# Altium PCB pcb.PcbDoc
Units mil, origin at the board's own origin, x right, y up, seen from the top; angles counter-clockwise.
Board outline 1000 x 1000 mil, 4 copper layers (Top Layer, Layer 1, Layer 2, Bottom Layer), stack 61.855 mil thick; 57 components, 65 nets, 223 pads, 138 vias.
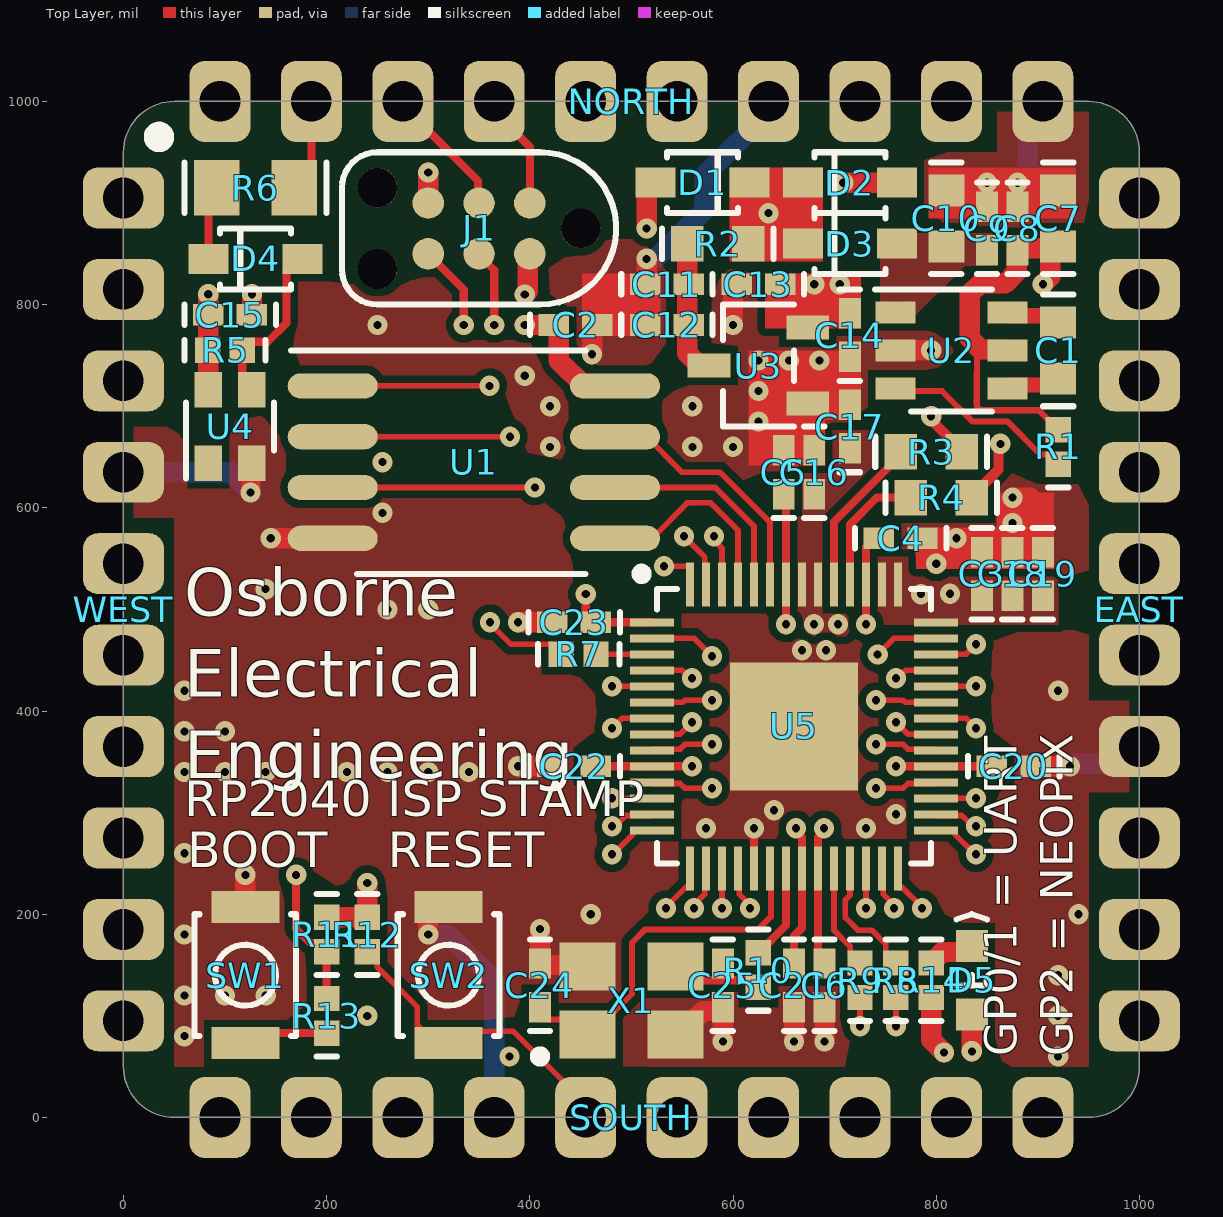
[diagram p0: Top Layer view]
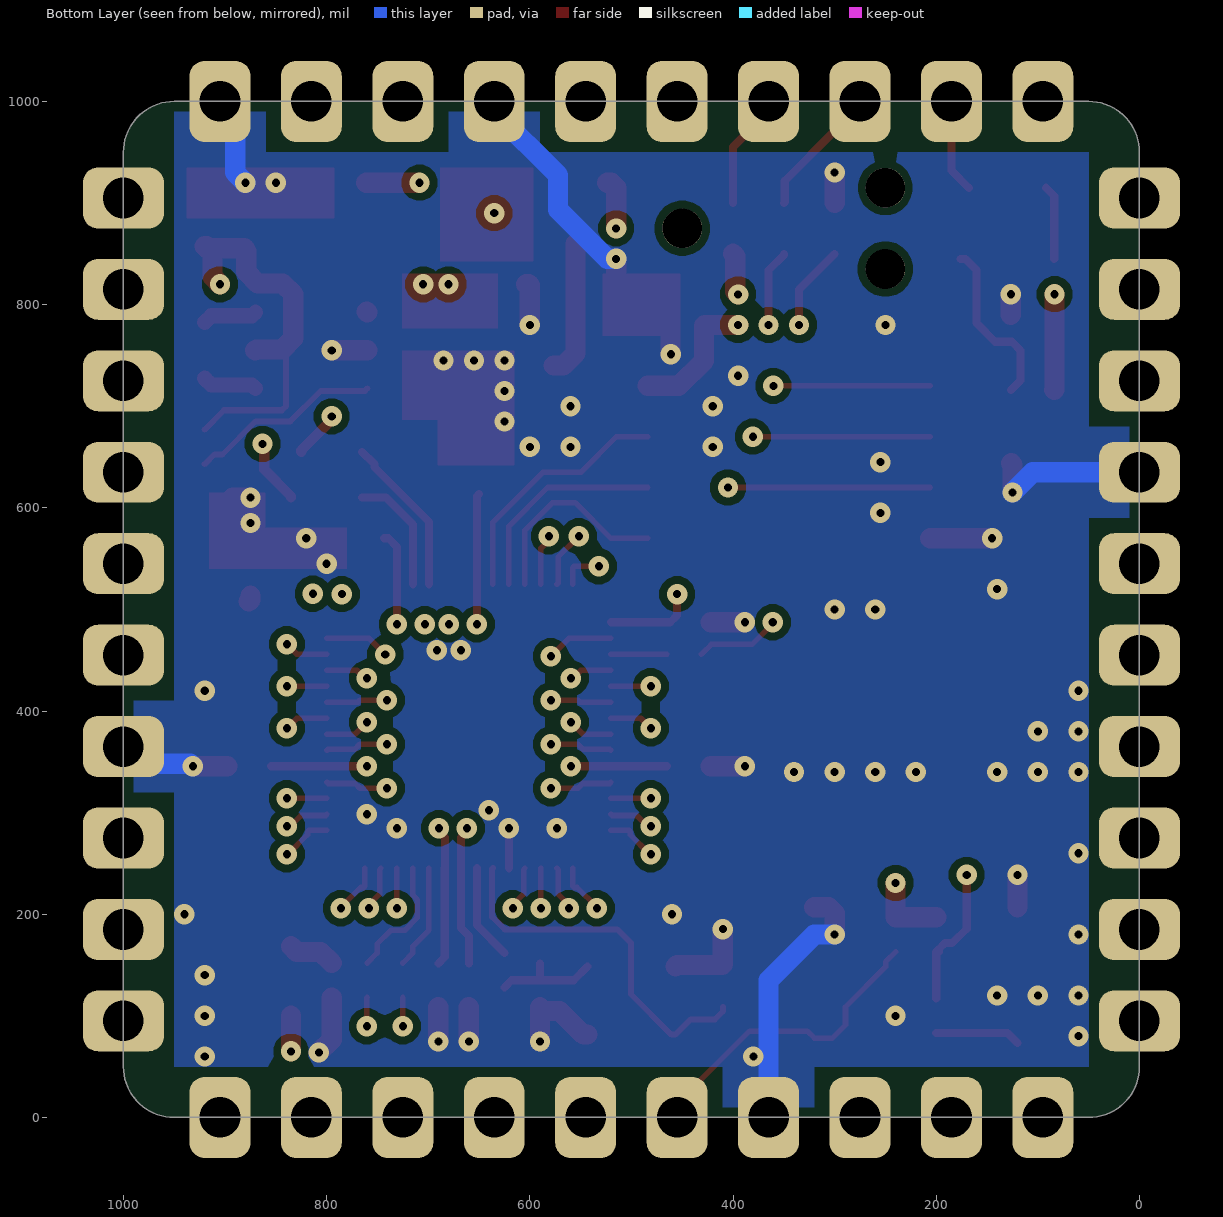
[diagram p1: Bottom Layer view, seen from below]
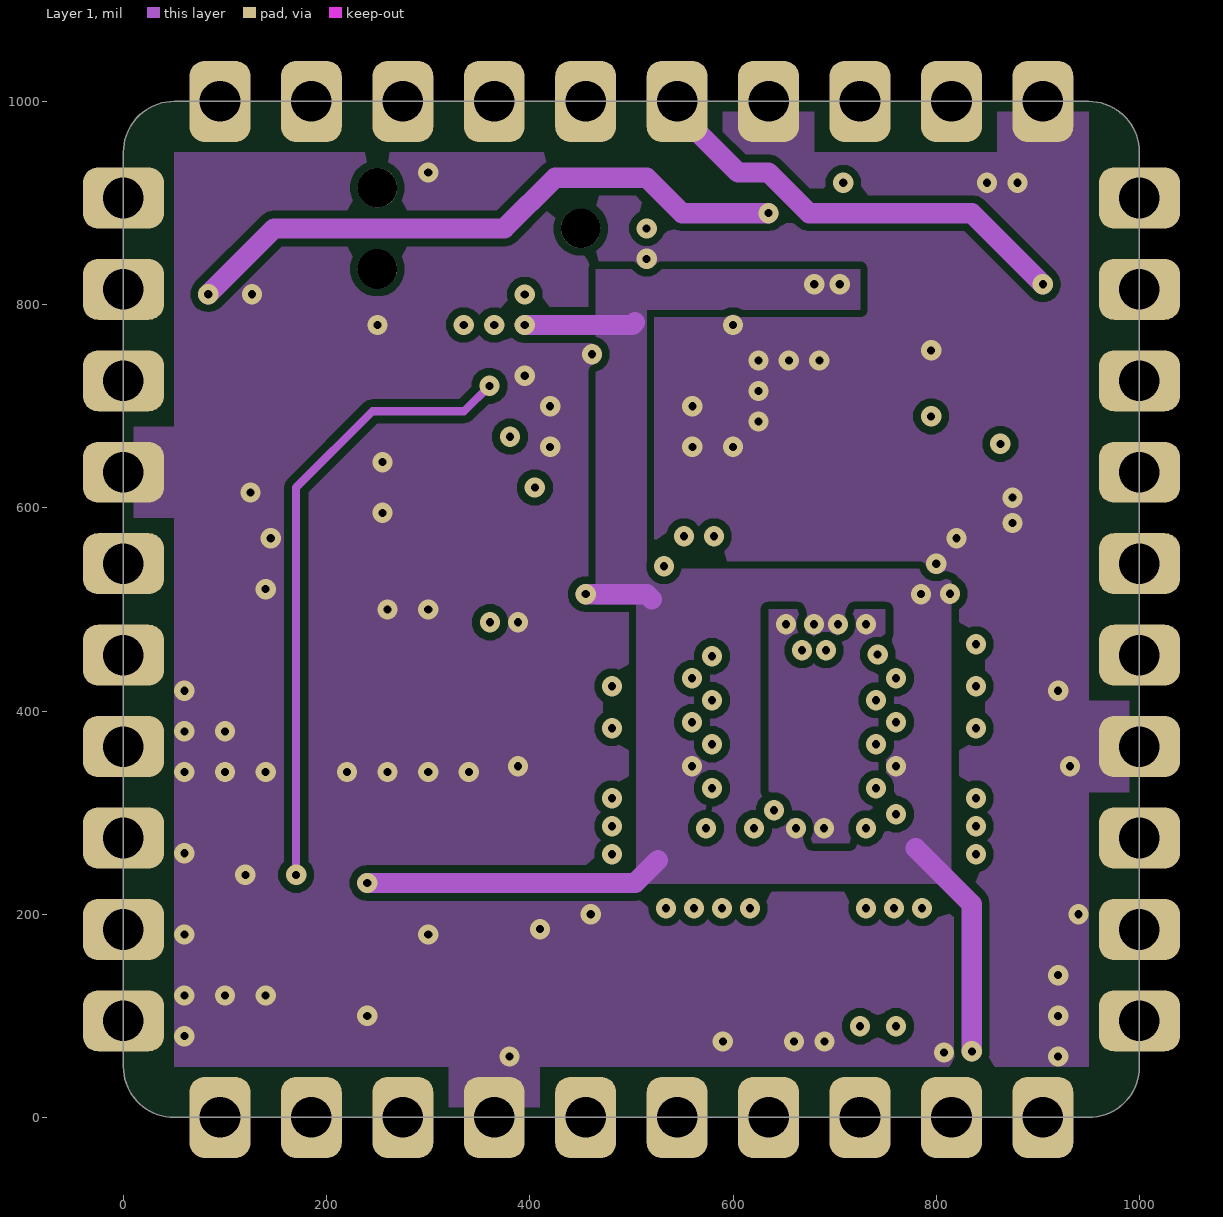
[diagram p2: Layer 1]
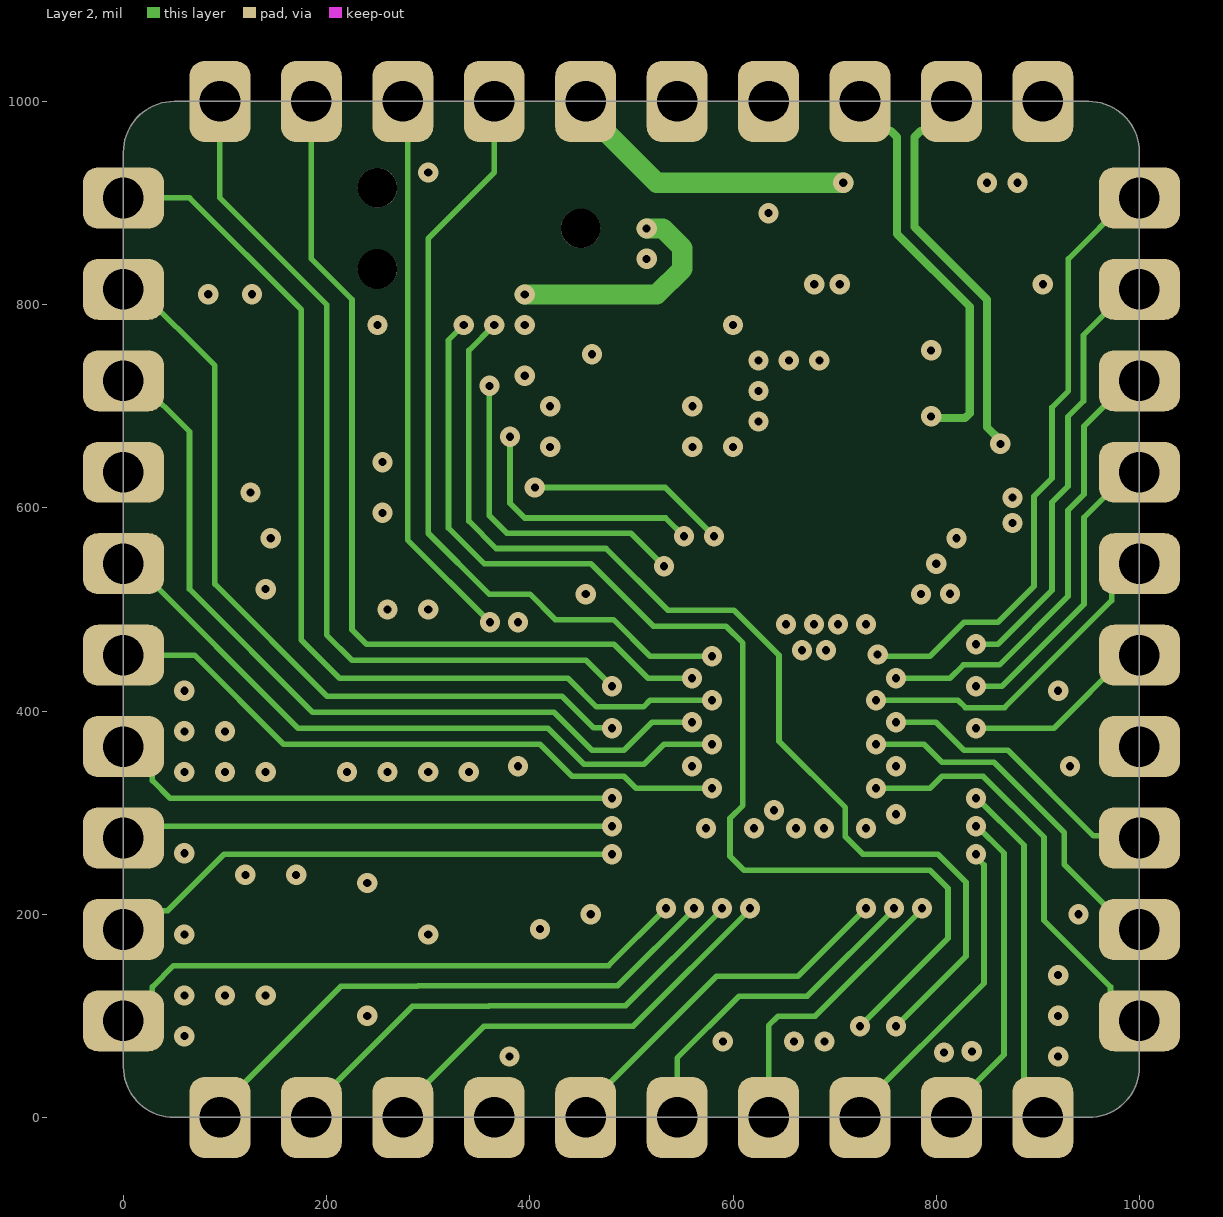
[diagram p3: Layer 2]
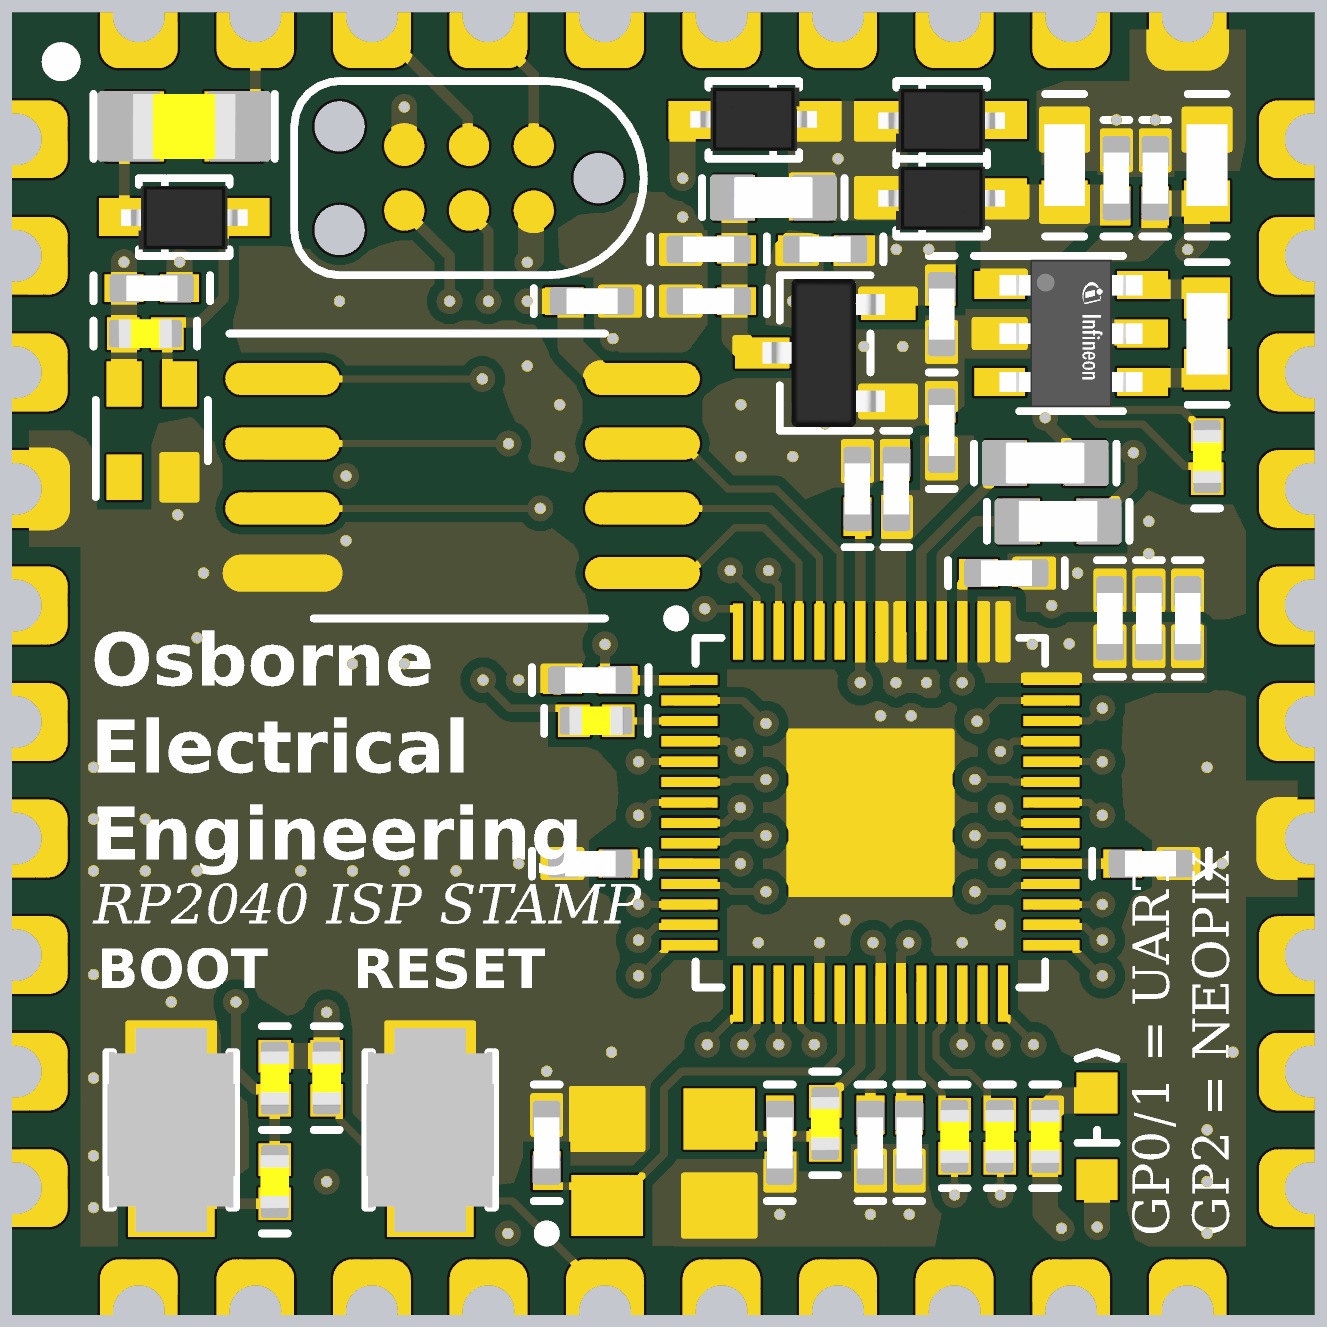
[diagram p4: 3D render of the assembled board from above, using the file's embedded part models]

## Layer stack, top to bottom
Top Solder: solder mask 0.5, Solder Resist, Dk 3.8
Top Layer: signal copper 1.4
Dielectric 2: prepreg 7.874, 7628, Dk 4.6
Layer 1: signal copper 0.689
Dielectric 1: core 41.9291, 7628, Dk 4.6
Layer 2: signal copper 0.689
Dielectric 3: prepreg 7.874, 7628, Dk 4.6
Bottom Layer: signal copper 1.4
Bottom Solder: solder mask 0.5, Solder Resist, Dk 3.8

## Board outline
0,50 0,950 cw(c50,950) 50,1000 950,1000 cw(c950,950) 1000,950 1000,50 cw(c950,50) 950,0 50,0 cw(c50,50)

## Design rules (kind name [scope] priority, off if disabled: settings)
BoardOutlineClearance [Not HasFootprint('CASTELLATIONS')] p1: gap=10 ignorepadtopadclearanceinfootprint=FALSE except(0: Track-OutlineEdge)
Clearance [All] p1: gap=7.5 ignorepadtopadclearanceinfootprint=FALSE except(5: Arc-Arc Arc-Track Track-Track)
ComponentClearance [All] p1: gap=10 collisioncheckmode=3 verticalgap=100000 showdistances=TRUE donotcheckwithout3dbody=TRUE
DiffPairsRouting Netclass_90ohm [InDifferentialPairClass('90ohm')] p1: maxlimit=20 minlimit=6.5 mostfreqgap=20 toplayer_maxgap=6.5 toplayer_prefgap=6.5 toplayer_minwidth=10 toplayer_maxwidth=10 toplayer_prefwidth=10 midlayer2_mingap=9 midlayer2_maxgap=9 midlayer2_prefgap=9 midlayer2_minwidth=8 midlayer2_maxwidth=8 midlayer2_prefwidth=8 impedanceprofiledriven=TRUE impedanceprofileid={C649F7BD-3770-45B3-A50B-245186EF4A6F} impedanceprofilevalue=90.000000 maxuncoupledlength=500
DiffPairsRouting Default_DiffPair [All] p2: maxlimit=10 minlimit=10 mostfreqgap=10 toplayer_minwidth=15 toplayer_maxwidth=15 toplayer_prefwidth=15 midlayer1_minwidth=15 midlayer1_maxwidth=15 midlayer1_prefwidth=15 midlayer2_minwidth=15 midlayer2_maxwidth=15 midlayer2_prefwidth=15 bottomlayer_minwidth=15 bottomlayer_maxwidth=15 bottomlayer_prefwidth=15 maxuncoupledlength=500
HoleSize [All] p1: absolutevalues=TRUE maxlimit=200 minlimit=8 maxpercent=80.000 minpercent=20.000
MinimumAnnularRing [All] p1: minimumring=6
MinimumSolderMaskSliver [All] p1: minsoldermaskwidth=3.94
PasteMaskExpansion [All] p1: expansion=-99999 usepaste=FALSE
PolygonConnect [All] p1: connectstyle=Direct reliefconductorwidth=20 reliefentries=4 polygonreliefangle="90 Angle" airgapwidth=10
RoutingVias [All] p1: holewidth=8 width=20 viastyle="Through Hole" minholewidth=8 minwidth=20 maxholewidth=35 maxwidth=70
SilkToSilkClearance [All] p1: silktosilkclearance=4
SilkToSolderMaskClearance [IsPad] p1: minsilkscreentomaskgap=3.5 clearancetoexposedcopper=FALSE
SolderMaskExpansion [All] p1: expansion=1.97 istentingtop=FALSE
UnRoutedNet [All] p1: checkbadconnections=TRUE
Width Default_Width [All] p1: maxlimit=100 minlimit=3.5 preferedwidth=10
22 further rules are at their usual default settings.

## Classes and differential pairs
differential pair class 90ohm: USB_EXT
differential pair USB_EXT: +USB_EXT_P -USB_EXT_N

## Components (designator, comment, footprint, x,y, rotation, side; value= is the part's Value field where it differs from the comment)
C1 "2.2uF" C0603 920,755 r270 top
C2 "100nF" C0402 445,780 r180 top
C3 "1uF" C0402 845,535 r270 top
C4 "1uF" C0402 765,570 r180 top
C5 "100nF" C0402 650,635 r270 top
C6 "100nF" C0402 690,130 r90 top
C7 "10uF" C0603 920,885 r270 top
C8 "100nF" C0402 880,875 r270 top
C9 "100nF" C0402 850,875 r270 top
C10 "10uF" C0603 810,885 r270 top
C11 "1uF" C0402 535,820 r0 top
C12 "100nF" C0402 535,780 r0 top
C13 "100nF" C0402 625,820 r0 top
C14 "1uF" C0402 715,770 r90 top
C15 "100nF" C0402 105,790 r180 top
C16 "100nF" C0402 680,635 r270 top
C17 "100nF" C0402 715,680 r270 top
C18 "100nF" C0402 875,535 r270 top
C19 "100nF" C0402 905,535 r270 top
C20 "100nF" C0402 876.38,345.63 r180 top
C21 "100nF" C0402 660,130 r90 top
C22 "100nF" C0402 443.62,345.63 r0 top
C23 "100nF" C0402 443.62,487.36 r0 top
C24 "33pF" C0402 410,130 r270 top
C25 "33pF" C0402 590,130 r90 top
D1 "1N5819WS" SOD-323_L1.8-W1.3-LS2.5-RD 570,920 r180 top
D2 "1N5819WS" SOD-323_L1.8-W1.3-LS2.5-RD 715,920 r0 top
D3 "1N5819WS" SOD-323_L1.8-W1.3-LS2.5-RD 715,860 r0 top
D4 "1N4148WS T4" SOD-323_L1.8-W1.3-LS2.5-RD 130,845 r0 top
D5 "19-217/GHC-YR1S2/3T" LED0603-R-RD 835,135 r270 top
EAST "STAMPEDGE" CASTELLATIONS 1000,500 r270 top locked
J1 "TC2030-IDC-NL" TC2030-IDC-NL 450,875 r180 top locked
NORTH "STAMPEDGE" CASTELLATIONS 500,1000 r0 top locked
R1 "10kΩ" R0402 920,660 r90 top
R2 "2.2Ω" R0603 585,860 r180 top
R3 "27Ω" R0603 795,655 r0 top
R4 "27Ω" R0603 805,610 r0 top
R5 "10kΩ" R0402 100,755 r180 top
R6 "0Ω" R0805 130,915 r0 top
R7 "100Ω" R0402 448.12,455.87 r180 top
R8 "100Ω" R0402 760,135 r270 top
R9 "100Ω" R0402 725,135 r270 top
R10 "1kΩ" R0402 625,145 r270 top
R11 "10kΩ" R0402 200,180 r90 top
R12 "10kΩ" R0402 240,180 r90 top
R13 "1kΩ" R0402 200,100 r90 top
R14 "220Ω" R0402 795,135 r90 top
SOUTH "STAMPEDGE" CASTELLATIONS 500,0 r180 top locked
SW1 "B3U-1000P" KEY-SMD_B3U-1000PM 120,140 r270 top
SW2 "B3U-1000P" KEY-SMD_B3U-1000PM 320,140 r270 top
U1 "W25Q128JVSIQTR" SOIC-8_L5.3-W5.3-P1.27-LS8.0-BL 345,645 r270 top
U2 "HX4002" SOT-23-6_L2.9-W1.6-P0.95-LS2.8-BR 815,755 r180 top
U3 "XC6206P332MR" SOT-23-3_L2.9-W1.6-P1.90-LS2.8-BR 625,740 r0 top
U4 "WS2812B-2020" LED-SMD_4P-L2.0-W2.0-TL_WS2812B-2020 105,680 r90 top
U5 "RP2040" LQFN-56_L7.0-W7.0-P0.4-EP 660,385 r0 top
WEST "STAMPEDGE" CASTELLATIONS 0,500 r90 top locked
X1 "12MHz" OSC-SMD_4P-L3.2-W2.5-BL 500,115 r0 top

## Footprints (in the part's own frame and the unit in brackets; to place one, negate y for a bottom-side part, rotate by r counter-clockwise, add the part's x,y. Pads: shape width x height; smd on the part's side, far side on the other; paste and mask are expansions set on the pad)
C0402 [mil]
  rect 30x21.5 smd: 1(-21.5,0) 2(21.5,0)
  silkscreen extent -45,-10 45,10, body extent -20,-10 20,10, height 5
C0603 [mm]
  rect 0.8x0.9 smd: 1(-0.7,0) 2(0.7,0)
  silkscreen extent -1.4,-0.38 1.4,0.38, body extent -0.8,-0.4 0.8,0.4, height 0.8
CASTELLATIONS [mil]
  rrect50% 60x80 hole 40 paste-100: 1(-405,0) 2(-315,0) 3(-225,0) 4(-135,0) 5(-45,0) 6(45,0) 7(135,0) 8(225,0) 9(315,0) 10(405,0)
KEY-SMD_B3U-1000PM [mm]
  rect 0.8x1.7 smd: 1(-1.7,0) 2(1.7,0)
  silkscreen extent -1.52,-1.27 1.52,1.27, body extent -2,-1.25 2,1.25, height 1.6
LED0603-R-RD [mm]
  rect 0.8x0.8 smd: 1(0.851,0) 2(-0.851,0)
  silkscreen extent -1.65,-0.38 0.13,0.38
LED-SMD_4P-L2.0-W2.0-TL_WS2812B-2020 [mil]
  rect 35x27 smd: 1(-36,21.3) 2(-36,-21.3) 3(36,-21.3) 4(36,21.3)
  silkscreen extent -51,-43 24,43, body extent -43,-39 43,39, height 33
LQFN-56_L7.0-W7.0-P0.4-EP [mm]
  rect 1.1x0.2 smd: 1(-3.55,2.6) 2(-3.55,2.2) 3(-3.55,1.8) 4(-3.55,1.4) 5(-3.55,1) 6(-3.55,0.6) 7(-3.55,0.2) 8(-3.55,-0.2) 9(-3.55,-0.6) 10(-3.55,-1) 11(-3.55,-1.4) 12(-3.55,-1.8) 13(-3.55,-2.2) 14(-3.55,-2.6) 29(3.55,-2.6) 30(3.55,-2.2) 31(3.55,-1.8) 32(3.55,-1.4) 33(3.55,-1) 34(3.55,-0.6) 35(3.55,-0.2) 36(3.55,0.2) 37(3.55,0.6) 38(3.55,1) 39(3.55,1.4) 40(3.55,1.8) 41(3.55,2.2) 42(3.55,2.6)
  rect 0.2x1.1 smd: 15(-2.6,-3.55) 16(-2.2,-3.55) 17(-1.8,-3.55) 18(-1.4,-3.55) 19(-1,-3.55) 20(-0.6,-3.55) 21(-0.2,-3.55) 22(0.2,-3.55) 23(0.6,-3.55) 24(1,-3.55) 25(1.4,-3.55) 26(1.8,-3.55) 27(2.2,-3.55) 28(2.6,-3.55) 43(2.6,3.55) 44(2.2,3.55) 45(1.8,3.55) 46(1.4,3.55) 47(1,3.55) 48(0.6,3.55) 49(0.2,3.55) 50(-0.2,3.55) 51(-0.6,3.55) 52(-1,3.55) 53(-1.4,3.55) 54(-1.8,3.55) 55(-2.2,3.55) 56(-2.6,3.55)
  rect 3.2x3.2 smd: 57(0,0)
  silkscreen extent -3.94,-3.43 3.43,3.94, body extent -3.5,-3.5 3.5,3.5, height 0.9
OSC-SMD_4P-L3.2-W2.5-BL [mm]
  rect 1.4x1.2 smd: 1(-1.1,-0.85) 2(1.1,-0.85) 3(1.1,0.85) 4(-1.1,0.85)
  silkscreen extent -2.41,-1.52 -2.16,-1.27, body extent -1.6,-1.3 1.6,1.3, height 0.76
R0402 [mil]
  rect 25x25 smd: 1(-17,0) 2(17,0)
  silkscreen extent -40,-10 40,10, body extent -21,-11 21,11, height 19
R0603 [mil]
  rect 32x35 smd: 1(-30,0) 2(30,0)
  silkscreen extent -55,-15 55,15, body extent -31,-16 31,16, height 19
R0805 [mil]
  rect 44.59x54.21 smd: 1(-38.04,0) 2(38.04,0)
  silkscreen extent -70,-25 70,25, body extent -40,-25 40,25, height 19
SOD-323_L1.8-W1.3-LS2.5-RD [mm]
  rect 1x0.75 smd: 1(-1.173,0) 2(1.173,0)
  silkscreen extent -0.89,-0.76 0.89,0.76, body extent -1.24,-0.64 1.25,0.61, height 0.88
SOIC-8_L5.3-W5.3-P1.27-LS8.0-BL [mm]
  oval 0.63x2.25 smd: 1(-1.905,-3.53) 2(-0.635,-3.53) 3(0.635,-3.53) 4(1.905,-3.53) 5(1.905,3.53) 6(0.635,3.53) 7(-0.635,3.53) 8(-1.905,3.53)
  silkscreen extent -2.79,-4.57 2.79,2.79, body extent -2.67,-2.29 2.64,2.29, height 2.16
SOT-23-3_L2.9-W1.6-P1.90-LS2.8-BR [mm]
  rect 1.07x0.6 smd: 1(1.235,-0.95) 2(1.235,0.95) 3(-1.235,0)
  silkscreen extent -0.89,-1.52 0.89,1.52, body extent -1.23,-1.45 1.17,1.45, height 0.96
SOT-23-6_L2.9-W1.6-P0.95-LS2.8-BR [mm]
  rect 1x0.55 smd: 1(1.4,-0.95) 2(1.4,0) 3(1.4,0.95) 4(-1.4,0.95) 5(-1.4,0) 6(-1.4,-0.95)
  silkscreen extent -1.02,-1.52 1.91,1.52, body extent -1.4,-1.45 1.4,1.45, height 1.26
TC2030-IDC-NL [mil] "Tag Connect 6-Pin No Legs"
  round 38.9 hole 39 unplated: 0(0,0) 0(200,-40) 0(200,40)
  round 31 smd paste-100: 1(50,-25) 2(50,25) 3(100,-25) 4(100,25) 5(150,-25) 6(150,25)
  silkscreen extent -35,-75 235,75

## Part data
C1: "16V 2.2uF X5R ±10% 0603  Multilayer Ceramic Capacitors MLCC - SMD/SMT ROHS", BOM_JLCPCB Part Class="Basic Part", BOM_Manufacturer=SAMSUNG, BOM_Manufacturer Part=CL10A225KO8NNNC, BOM_Supplier=LCSC, BOM_Supplier Part=C23630, nameAlias=Capacitance, spicePre=C, spiceSymbolName=CL10A225KO8NNNC
C2 C5 C6 C8 C9 C12 C13 C15 C16 C17 C18 C19 C20 C21 C22 C23: "16V 100nF X7R ±10% 0402  Multilayer Ceramic Capacitors MLCC - SMD/SMT ROHS", BOM_JLCPCB Part Class="Basic Part", BOM_Manufacturer=SAMSUNG, BOM_Manufacturer Part=CL05B104KO5NNNC, BOM_Supplier=LCSC, BOM_Supplier Part=C1525, nameAlias=Capacitance, spicePre=C, spiceSymbolName=CL05B104KO5NNNC
C3 C4 C11 C14: "25V 1uF X5R ±10% 0402  Multilayer Ceramic Capacitors MLCC - SMD/SMT ROHS", BOM_JLCPCB Part Class="Basic Part", BOM_Manufacturer=SAMSUNG, BOM_Manufacturer Part=CL05A105KA5NQNC, BOM_Supplier=LCSC, BOM_Supplier Part=C52923, nameAlias=Capacitance, spicePre=C, spiceSymbolName=CL05A105KA5NQNC
C7 C10: "X5R 25V ±20% 10uF 0603 Multilayer Ceramic Capacitors MLCC - SMD/SMT ROHS", BOM_JLCPCB Part Class="Basic Part", BOM_Manufacturer=SAMSUNG, BOM_Manufacturer Part=CL10A106MA8NRNC, BOM_Supplier=LCSC, BOM_Supplier Part=C96446, nameAlias=Capacitance, spicePre=C, spiceSymbolName=CL10A106MA8NRNC
C24 C25: "50V 33pF C0G ±5% 0402  Multilayer Ceramic Capacitors MLCC - SMD/SMT ROHS", BOM_JLCPCB Part Class="Basic Part", BOM_Manufacturer=FH, BOM_Manufacturer Part=0402CG330J500NT, BOM_Supplier=LCSC, BOM_Supplier Part=C1562, nameAlias=Capacitance, spicePre=C, spiceSymbolName=0402CG330J500NT
D1 D2 D3: "40V 600mV@1A 1A SOD-323  Schottky Barrier Diodes (SBD) ROHS", BOM_JLCPCB Part Class="Basic Part", BOM_Manufacturer="Guangdong Hottech", BOM_Manufacturer Part=1N5819WS, BOM_Supplier=LCSC, BOM_Supplier Part=C191023, Contributor=LCSC, spicePre=D, spiceSymbolName=1N5819WS
D4: "100V +150℃@(Tj) 200mW Single 1.25V@150mA 4ns 1μA@75V 150mA SOD-323  Switching Diode ROHS", BOM_JLCPCB Part Class="Basic Part", BOM_Manufacturer=CJ, BOM_Manufacturer Part="1N4148WS T4", BOM_Supplier=LCSC, BOM_Supplier Part=C2128, spicePre=D, spiceSymbolName="1N4148WS T4"
D5: "20mA 285mcd 3.3V 518nm Colorless transparence -40℃~+85℃ 520nm~535nm Emerald 120° 110mW 0603  Light Emitting Diodes (LED) ROHS", BOM_JLCPCB Part Class="Basic Part", BOM_Manufacturer=EVERLIGHT, BOM_Manufacturer Part=19-217/GHC-YR1S2/3T, BOM_Supplier=LCSC, BOM_Supplier Part=C72043, spicePre=L, spiceSymbolName=19-217/GHC-YR1S2/3T
EAST NORTH SOUTH WEST: "RP2040 ISP Stamp Castellations"
J1: "Tag-Connect 6-Pin No Legs"
R1 R5 R11 R12: "1/16W Thick Film Resistors 50V ±1% ±100ppm/℃ -55℃~+155℃ 10kΩ 0402  Chip Resistor - Surface Mount ROHS", BOM_JLCPCB Part Class="Basic Part", BOM_Manufacturer=UniOhm, BOM_Manufacturer Part=0402WGF1002TCE, Resistance (Ohms)=10K, BOM_Supplier=LCSC, BOM_Supplier Part=C25744, nameAlias=Resistance, spicePre=R, spiceSymbolName=0402WGF1002TCE
R2: "1/10W Thick Film Resistors 75V ±1% ±400ppm/℃ -55℃~+155℃ 2.2Ω 0603  Chip Resistor - Surface Mount ROHS", BOM_JLCPCB Part Class="Basic Part", BOM_Manufacturer=UniOhm, BOM_Manufacturer Part=0603WAF220KT5E, Resistance (Ohms)=2.2, BOM_Supplier=LCSC, BOM_Supplier Part=C22939, nameAlias=Resistance, spicePre=R, spiceSymbolName=0603WAF220KT5E
R3 R4: "1/10W Thick Film Resistors 75V ±1% ±200ppm/℃ -55℃~+155℃ 27Ω 0603  Chip Resistor - Surface Mount ROHS", BOM_JLCPCB Part Class="Basic Part", BOM_Manufacturer=UniOhm, BOM_Manufacturer Part=0603WAF270JT5E, Resistance (Ohms)=27, BOM_Supplier=LCSC, BOM_Supplier Part=C25190, nameAlias=Resistance, spicePre=R, spiceSymbolName=0603WAF270JT5E
R6: "125mW Thick Film Resistors 150V ±1% ±800ppm/℃ -55℃~+155℃ 0mΩ 0805  Chip Resistor - Surface Mount ROHS", BOM_JLCPCB Part Class="Basic Part", BOM_Manufacturer=UniOhm, BOM_Manufacturer Part=0805W8F0000T5E, Resistance (Ohms)=0, BOM_Supplier=LCSC, BOM_Supplier Part=C17477, nameAlias=Resistance, spicePre=R, spiceSymbolName=0805W8F0000T5E
R7 R8 R9: "1/16W Thick Film Resistors 50V ±1% ±200ppm/℃ -55℃~+155℃ 100Ω 0402  Chip Resistor - Surface Mount ROHS", BOM_JLCPCB Part Class="Basic Part", BOM_Manufacturer=UniOhm, BOM_Manufacturer Part=0402WGF1000TCE, Resistance (Ohms)=100, BOM_Supplier=LCSC, BOM_Supplier Part=C25076, nameAlias=Resistance, spicePre=R, spiceSymbolName=0402WGF1000TCE
R10 R13: "1/16W Thick Film Resistors 50V ±1% ±100ppm/℃ -55℃~+155℃ 1kΩ 0402  Chip Resistor - Surface Mount ROHS", BOM_JLCPCB Part Class="Basic Part", BOM_Manufacturer=UniOhm, BOM_Manufacturer Part=0402WGF1001TCE, Resistance (Ohms)=1K, BOM_Supplier=LCSC, BOM_Supplier Part=C11702, nameAlias=Resistance, spicePre=R, spiceSymbolName=0402WGF1001TCE
R14: "1/16W Thick Film Resistors 50V ±1% ±100ppm/℃ -55℃~+155℃ 220Ω 0402  Chip Resistor - Surface Mount ROHS", BOM_JLCPCB Part Class="Basic Part", BOM_Manufacturer=UniOhm, BOM_Manufacturer Part=0402WGF2200TCE, Resistance (Ohms)=220, BOM_Supplier=LCSC, BOM_Supplier Part=C25091, nameAlias=Resistance, spicePre=R, spiceSymbolName=0402WGF2200TCE
SW1 SW2: "2.5mm 1.6mm Round Button 50mA Brick nogging 3mm SPST 12V SMD,3x2.5x1.6mm  Tactile Switches ROHS", BOM_JLCPCB Part Class="Extended Part", BOM_Manufacturer="Omron Electronics", BOM_Manufacturer Part=B3U-1000P, BOM_Supplier=LCSC, BOM_Supplier Part=C231329, Contributor=LCSC, spicePre=S, spiceSymbolName=B3U-1000P
U1: "SOIC-8_208mil  NOR FLASH ROHS", BOM_JLCPCB Part Class="Basic Part", BOM_Manufacturer=WINBOND, BOM_Manufacturer Part=W25Q128JVSIQTR, BOM_Supplier=LCSC, BOM_Supplier Part=C97521, spicePre=U, spiceSymbolName=W25Q128JVSIQTR
U2: "NO Charge pump 1 5V 2.7V~5.5V 250mA 1.2MHz SOT-23-6  DC-DC Converters ROHS", BOM_JLCPCB Part Class="Extended Part", BOM_Manufacturer=HEXIN, BOM_Manufacturer Part=HX4002, BOM_Supplier=LCSC, BOM_Supplier Part=C172354, Contributor=LCSC, spicePre=U, spiceSymbolName=HX4002
U3: "200mA 680mV@(100mA) Fixed 3.3V~3.3V Positive 1 6V SOT-23-3L  Linear Voltage Regulators (LDO) ROHS", BOM_JLCPCB Part Class="Basic Part", BOM_Manufacturer=TOREX, BOM_Manufacturer Part=XC6206P332MR, BOM_Supplier=LCSC, BOM_Supplier Part=C5446, spicePre=U, spiceSymbolName=XC6206P332MR
U4: "5mA 5.3V -25℃~+85℃ RGB SMD,2x2mm  Light Emitting Diodes (LED) ROHS", BOM_JLCPCB Part Class="Extended Part", BOM_Manufacturer=Worldsemi, BOM_Manufacturer Part=WS2812B-2020, BOM_Supplier=LCSC, BOM_Supplier Part=C965555, Contributor=LCSC, spicePre=L, spiceSymbolName=WS2812B-2020
U5: "ARM Cortex-M0 1@x4ch/12bit USB Host/Device 2 264KB 2 133MHz 30 2 QFN-56(7x7)  Microcontroller Units (MCUs/MPUs/SOCs) ROHS", BOM_JLCPCB Part Class="Extended Part", BOM_Manufacturer="Raspberry Pi(树莓派)", BOM_Manufacturer Part=RP2040, BOM_Supplier=LCSC, BOM_Supplier Part=C2040, Contributor=LCSC, spicePre=U, spiceSymbolName=RP2040
X1: "12MHz SMD Crystal Resonator 20pF ±10ppm ±30ppm -40℃~+85℃ SMD3225-4P  Crystals ROHS", BOM_JLCPCB Part Class="Basic Part", BOM_Manufacturer=YXC, BOM_Manufacturer Part=X322512MSB4SI, BOM_Supplier=LCSC, BOM_Supplier Part=C9002, nameAlias=Frequency, spicePre=X, spiceSymbolName=X322512MSB4SI

## Via types
v1: diameter 20, hole 8, Top Layer to Bottom Layer, tented both sides, 138 vias

## Nets (pads, with @x,y where several pads share a name; then routed paths per layer and width w, separated by ;. In a path a pad name is that pad's centre, name@x,y a point inside that pad or via, vN(x,y) a via of type N, cw(c..) or ccw(c..) an arc to the next point about the centre after c; other vN are vias at no path point)
1V1: C4.2 C5.2 C6.2 U5.23 U5.45 U5.50 | length 359.5
  Top Layer w8: C5.2 652.06,611.44 U5.50 U5.50 v1(652.13,485.39) ; v1(689.53,284.61) 689.53,281.36 683.62,275.45 U5.23 683.68,245.17 683.68,157.82 C6.2 ; v1(730.87,485.39) U5.45 730.87,561.62 739.25,570 C4.2
3V3: C2.2 C3.2 C13.2 C14.2 C16.2 C17.2 C18.2 C19.2 C20.2 C21.2 C22.2 C23.2 D5.1 R11.2 R12.2 U1.8 U3.2 U5.1 U5.10 U5.22 U5.33 U5.42 U5.43 U5.44 U5.48 U5.49 | length 1394.3
  Top Layer w8: v1(455,515) 455,494.11 461.75,487.36 C23.2 U5.1 ; C22.2 v1(559.61,345.63) ; C21.2 660,178.5 667.87,186.37 U5.22 667.87,275.45 661.97,281.36 v1(661.97,284.61) ; v1(760.39,345.63) C20.2
  Top Layer w20: R11.2 R12.2 v1(240,230.77) ; v1(395,780) C2.2 427.75,780 428.5,779.25 428.5,744.89 453.39,720 U1.8 ; C13.2 v1(680,820) ; D5.1@835,100 835.07,99.93 v1(835.07,65) ; C18.2 875,509.25 C18.2@876.54,507.71
  Layer 1 w20: v1(240,230.77) 503.8,230.77 526.14,253.11 ; v1(395,780) 501.11,780 503.61,782.5 ; v1(455,515) 515,515 520,510 ; 780,265 835.07,209.93 v1(835.07,65)
  other v1: 679.68,485.39 703.31,485.39 785,515 813.5,515.41 705,820
3V3_EXT: C7.2 C8.2 NORTH.6 R1.2 U2.5 | length 839.5
  Top Layer w6: 840,759.65 840,732.84 839.94,732.78 839.94,702.42 840,702.36 840,700 844,696 901,696 R1.2
  Top Layer w20: U2.5 869.3,755.82 843.83,755.82 832.94,766.71 832.94,810.47 843.19,820.72 867.72,820.72 879.25,832.25 879.25,852.75 C8.2 880,854.72 880.75,855.47 918.03,855.47 C7.2 918.03,857.45 912.28,851.7 912.28,827.28 v1(905,820)
  Layer 1 w20: NORTH.6 545,990 605,930 635,930 675,890 835,890 v1(905,820)
5V: C15.2 D1.1 D2.1 D3.1 R2.1 R5.2 U4.4 | length 707.9
  Top Layer w20: v1(83.5,810.24) C15.2 83.6,789.9 83.6,716.1 U4.4
  Layer 1 w20: v1(83.5,810.24) 148.26,875 375,875 425,925 515,925 550,890 v1(635,890)
5V_DBG: D1.2 J1.2 | length 322.2
  Top Layer w20: v1(395,810) 397.9,812.9 397.9,847.9 J1.2 ; v1(515,875) 515,915.24 519.76,920 D1.2
  Layer 2 w20: v1(395,810) 525,810 550,835 550,855.78 530.78,875 v1(515,875)
5V_EXT: D2.2 NORTH.5 | length 345.2
  Top Layer w20: v1(708.52,920) D2.2
  Layer 2 w20: NORTH.5 455,990 525,920 v1(708.52,920)
GND: C2.1 C3.1 C4.1 C5.1 C6.1 C7.1 C8.1 C9.1 C10.1 C11.1 C12.1 C13.1 C14.1 C15.1 C16.1 C17.1 C18.1 C19.1 C20.1 C21.1 C22.1 C23.1 C24.1 C25.1 EAST.7 J1.5 NORTH.7 NORTH.10 R14.1 SOUTH.7 SW1.1 SW2.1 U1.4 U2.2 U3.1 U4.2 U5.19 U5.57 WEST.7 X1.2 X1.4 | length 1779
  Top Layer w8: U5.19 v1(620.63,284.61)
  Top Layer w20: SW1.1 v1(120,238.77) ; v1(125,615) 125,642.7 U4.2 ; C15.1 v1(126.5,810.24) ; v1(145,570) U1.4 ; v1(300,180) 300,201.18 305.75,206.93 SW2.1 ; J1.5 v1(300,930) ; v1(388.35,345.63) C22.1 ; v1(388.35,487.36) C23.1 ; v1(410,185.27) C24.1 410,150.73 410.75,149.98 455.18,149.98 X1.4 ; v1(461.14,751.14) 461.5,751.5 461.5,779.25 462.25,780 C2.1 ; 490,779.25 490.75,780 C12.1 ; C11.1 514.25,820 515,820.75 v1(515,845) ; X1.2 547.24,81.54 570.44,104.73 589.25,104.73 590,105.48 C25.1 v1(590,74.73) ; v1(600,780) 600,819.25 600.75,820 C13.1 ; v1(660,74.73) C21.1 ; v1(690,74.73) C6.1 ; U2.2 v1(795,755) ; R14.1 795,76.55 v1(807.59,63.96) ; C10.1 v1@850,912.55 ; v1(850,920) v1@850,912.55 ; C18.1 v1(875,585) ; v1(875,610) 892.43,610 900,602.43 900,561.5 C19.1 ; v1(880,920) v1@880,912.55 ; C20.1 v1(931.65,345.63) ; C7.1 v1@880,912.55 ; v1@850,912.55 v1@880,912.55
  Bottom Layer w20: WEST.7 105,635 v1(125,615) ; v1(300,180) 320,180 365,135 SOUTH.7 ; v1(515,845) 523.89,845 572.24,893.35 572.24,927.24 635,990 NORTH.7 ; v1(880,920) 890,930 890,985 NORTH.10 ; v1(931.65,345.63) 934.11,348.09 983.09,348.09 EAST.7
  other v1: 380,60 920,60 60,80 240,100 920,100 60,120 100,120 140,120 920,140 60,180 460,200 940,200 60,260 573.39,284.61 730.87,284.61 760.39,298.39 640.32,302.32 60,340 100,340 140,340 220,340 260,340 300,340 340,340 60,380 100,380 60,420 920,420 667.87,459.8 691.5,459.8 260,500 300,500 140,520 800,545 820,570 255,595 255,645 420,660 560,660 600,660 625,685 420,700 560,700 625,715 395,730 625,745 655,745 685,745 250,780
GPIO0TX: J1.1 NORTH.4 U5.2 | length 962.3
  Top Layer w5.5: U5.2 561.57,471.61 v1(579.29,453.9)
  Top Layer w8: NORTH.4 365,990 400,955 J1.1
  Layer 2 w5.5: NORTH.4 365,930 300,865 300,575 360,515 400,515 425,490 482.17,490 518.27,453.9 v1(579.29,453.9)
GPIO1RX: R7.1 U5.3 | length 55.1
  Top Layer w5.5: R7.1 U5.3
GPIO2LED: NORTH.2 R6.2 U5.4 | length 1025.6
  Top Layer w5.5: U5.4 549.69,440.12 557.56,432.24 v1(559.61,432.24)
  Top Layer w8: R6.2 185,931.96 NORTH.2
  Layer 2 w5.5: NORTH.2 185,845 225,805 225,480 239.29,465.71 482.83,465.71 516.3,432.24 v1(559.61,432.24)
GPIO3: NORTH.1 U5.5 | length 909.7
  Top Layer w5.5: v1(480.87,424.37) U5.5
  Layer 2 w5.5: NORTH.1 95,905 200,800 200,475 225.04,449.96 455.28,449.96 v1(480.87,424.37)
GPIO4: U5.6 WEST.10 | length 1039.7
  Top Layer w5.5: U5.6 550.65,408.62 552.62,410.59 v1(579.29,410.59)
  Layer 2 w5.5: WEST.10 65,905 175,795 175,470 212.76,432.24 437.56,432.24 465.68,404.12 511.8,404.12 518.27,410.59 v1(579.29,410.59)
GPIO5: U5.7 WEST.9 | length 829.2
  Top Layer w5.5: v1(480.87,383.03) v1(480.87,383.03) 490.79,392.87 U5.7
  Layer 2 w5.5: WEST.9 15,815 90,740 90,525 200.47,414.53 431.65,414.53 462.63,383.55 480.35,383.55 v1(480.87,383.03)
GPIO6: U5.8 WEST.8 | length 856.7
  Top Layer w5.5: U5.8 547.8,377.13 v1(559.61,388.94)
  Layer 2 w5.5: WEST.8 15,725 65,675 65,520 186.22,398.78 423.78,398.78 461.18,361.38 492.68,361.38 520.24,388.94 v1(559.61,388.94)
GPIO7: U5.9 WEST.6 | length 730.7
  Top Layer w5.5: U5.9 521.42,362.57 547.9,362.57 552.62,367.28 v1(579.29,367.28)
  Layer 2 w5.5: WEST.6 10,545 171.97,383.03 417.87,383.03 453.31,347.6 512.36,347.6 532.05,367.28 v1(579.29,367.28)
GPIO8: U5.11 WEST.5 | length 695.1
  Top Layer w5.5: U5.11 521.42,328.7 547.9,328.7 552.62,323.98 v1(579.29,323.98)
  Layer 2 w5.5: WEST.5 70,455 157.72,367.28 410,367.28 441.5,335.79 492.68,335.79 504.49,323.98 v1(579.29,323.98)
GPIO9: U5.12 WEST.4 | length 545.5
  Top Layer w5.5: v1(480.87,314.13) U5.12
  Layer 2 w5.5: WEST.4 2.12,365 28.44,338.68 28.44,331.56 45.87,314.13 v1(480.87,314.13)
GPIO10: U5.13 WEST.3 | length 529.9
  Top Layer w5.5: v1(480.87,286.57) 484.09,286.57 494.71,297.2 519.05,297.2 U5.13
  Layer 2 w5.5: WEST.3 11.57,286.57 v1(480.87,286.57)
GPIO11: U5.14 WEST.2 | length 562.5
  Top Layer w5.5: v1(480.87,259.02) 481.94,259.02 501.33,278.4 501.33,281.45 502.52,282.64 U5.14
  Layer 2 w5.5: WEST.2 18.44,203.44 43.44,203.44 99.02,259.02 v1(480.87,259.02)
GPIO12: U5.15 WEST.1 | length 635.1
  Top Layer w5.5: v1(534.02,205.87) 534.02,206.94 553.4,226.33 556.45,226.33 557.64,227.52 U5.15
  Layer 2 w5.5: WEST.1 2.12,95 28.44,121.32 28.44,128.44 49.44,149.44 477.59,149.44 v1(534.02,205.87)
GPIO13: SOUTH.10 U5.16 | length 602.6
  Top Layer w5.5: v1(561.57,205.87) 561.57,209.09 572.2,219.71 572.2,244.05 U5.16
  Layer 2 w5.5: SOUTH.10 95,10 214.09,129.09 289.25,129.09 289.9,129.75 486.54,129.75 561.57,204.79 v1(561.57,205.87)
GPIO14: SOUTH.9 U5.17 | length 535.3
  Top Layer w5.5: v1(589.13,205.87) U5.17
  Layer 2 w5.5: SOUTH.9 185,10 284.41,109.41 359.56,109.41 360.22,110.07 494.41,110.07 589.13,204.79 v1(589.13,205.87)
GPIO15: SOUTH.8 U5.18 | length 477.7
  Top Layer w5.5: U5.18 606.07,244.05 606.07,219.71 616.69,209.09 v1(616.69,205.87)
  Layer 2 w5.5: SOUTH.8 275,10 354.72,89.72 501.63,89.72 616.69,204.79 v1(616.69,205.87)
GPIO16: SOUTH.5 U5.27 | length 377.8
  Top Layer w5.5: U5.27 747.8,244.05 747.8,219.71 758.43,209.09 v1(758.43,205.87)
  Layer 2 w5.5: SOUTH.5 545,58.37 605.89,119.25 672.89,119.25 758.43,204.79 v1(758.43,205.87)
GPIO17: SOUTH.4 U5.28 | length 340.7
  Top Layer w5.5: U5.28 762.36,227.52 763.55,226.33 766.6,226.33 785.98,206.94 v1(785.98,205.87)
  Layer 2 w5.5: SOUTH.4 635,90.31 644.25,99.57 680.76,99.57 785.98,204.79 v1(785.98,205.87)
GPIO18: SOUTH.3 U5.29 | length 363.8
  Top Layer w5.5: U5.29 817.48,282.64 818.67,281.45 818.67,278.4 838.06,259.02 v1(839.13,259.02)
  Layer 2 w5.5: SOUTH.3 725,10 847.01,132.01 847.01,248.54 839.13,256.42 v1(839.13,259.02)
GPIO19: SOUTH.2 U5.30 | length 364.3
  Top Layer w5.5: U5.30 800.95,297.2 825.29,297.2 835.91,286.57 v1(839.13,286.57)
  Layer 2 w5.5: SOUTH.2 815,10 866.69,61.69 866.69,260.09 840.21,286.57 v1(839.13,286.57)
GPIO20: SOUTH.1 U5.31 | length 381.4
  Top Layer w5.5: U5.31 v1(839.13,314.13)
  Layer 2 w5.5: v1(839.13,314.13) 840.21,314.13 886.38,267.97 886.38,18.62 SOUTH.1
GPIO21: EAST.10 U5.32 | length 477.6
  Top Layer w5.5: v1(740.71,323.98) 767.38,323.98 772.1,328.7 798.58,328.7 U5.32
  Layer 2 w5.5: v1(740.71,323.98) 793.86,323.98 805.67,335.79 846.12,335.79 906.06,275.84 906.06,193.94 971.56,128.44 971.56,121.32 997.88,95 EAST.10
GPIO22: EAST.9 U5.34 | length 414.7
  Top Layer w5.5: v1(740.71,367.28) 767.38,367.28 772.1,362.57 798.58,362.57 U5.34
  Layer 2 w5.5: v1(740.71,367.28) 787.95,367.28 805.67,349.57 856.85,349.57 926,280.42 926,249 990,185 EAST.9
GPIO23: EAST.8 U5.35 | length 331.1
  Top Layer w5.5: v1(760.39,388.94) 772.2,377.13 U5.35
  Layer 2 w5.5: v1(760.39,388.94) 799.76,388.94 827.32,361.38 870.63,361.38 954.97,277.04 997.96,277.04 EAST.8
GPIO24: EAST.6 U5.36 | length 234.1
  Top Layer w5.5: U5.36 829.21,392.87 v1(839.13,383.03) v1(839.13,383.03)
  Layer 2 w5.5: v1(839.13,383.03) 915.91,383.03 987.87,455 EAST.6
GPIO25: EAST.5 U5.37 | length 386.8
  Top Layer w5.5: v1(740.71,410.59) 767.38,410.59 769.35,408.62 U5.37
  Layer 2 w5.5: v1(740.71,410.59) 821.42,410.59 828.73,403.28 867.26,403.28 972.56,508.59 972.56,518.68 998.88,545 EAST.5
GPIO26: EAST.4 U5.38 | length 337.5
  Top Layer w5.5: U5.38 v1(839.13,424.37)
  Layer 2 w5.5: v1(839.13,424.37) 864.72,424.37 945.43,505.08 945.43,590.43 990,635 EAST.4
GPIO27: EAST.3 U5.39 | length 492.3
  Top Layer w5.5: v1(760.39,432.24) 762.44,432.24 770.31,440.12 U5.39
  Layer 2 w5.5: v1(760.39,432.24) 813.54,432.24 826.76,445.46 862.19,445.46 929.69,512.95 929.69,597.6 945.43,613.35 945.43,680.28 990.16,725 EAST.3
GPIO28: EAST.2 U5.40 | length 477.9
  Top Layer w5.5: U5.40 829.21,455.87 v1(839.13,465.71) v1(839.13,465.71)
  Layer 2 w5.5: v1(839.13,465.71) 860.79,465.71 913.94,518.86 913.94,605.47 929.69,621.22 929.69,689.68 945,705 945,770 990,815 EAST.2
GPIO29: EAST.1 U5.41 | length 678.3
  Top Layer w5.5: v1(742.3,455.62) 758.29,471.61 U5.41
  Layer 2 w5.5: v1(742.3,455.62) 744.02,453.9 793.86,453.9 827.32,487.36 860.79,487.36 896.22,522.8 896.22,611.38 913.94,629.09 913.94,698.94 930,715 930,845 990,905 EAST.1
NetC1_1: C1.1 U2.6 | length 54
  Top Layer w15: U2.6 873.45,789.07 913.49,789.07 C1.1
NetC1_2: C1.2 U2.4 | length 54
  Top Layer w15: U2.4 873.45,720.93 913.48,720.93 C1.2
NetC9_2: C9.2 C10.2 D3.2 U2.1 | length 0.9
  Top Layer w20: U2.1 U2.1@760.52,793.04
NetC11_2: C11.2 C12.2 R2.2 U3.3 | length 134.3
  Top Layer w20: R2.2 555,752.12 567.12,740 U3.3
NetC25_2: C25.2 R10.2 X1.3 | length 106.7
  Top Layer w8: X1.3 556.77,135 590,135 ; C25.2 590,135 ; R10.2 618,135 590,135
NetD4_1: D4.1 R6.1 | length 73.4
  Top Layer w8: D4.1 83.84,906.88 R6.1
NetD4_2: D4.2 R5.1 U4.3 | length 169.9
  Top Layer w8: U4.3 117,725.3 R5.1 125.5,763.5 142.01,763.5 160.48,781.97 160.48,834.24 171.24,845 D4.2
NetD5_2: D5.2 R14.2 | length 46.8
  Top Layer w20: R14.2 805.75,162.75 829.25,162.75 D5.2
NetJ1_4: J1.4 R8.2 | length 1181.3
  Top Layer w5.5: R8.2 760.39,117.61 v1(760.39,89.72)
  Top Layer w8: J1.4 350,848.81 365,833.81 v1(365,780)
  Layer 2 w5.5: v1(365,780) 340,755 340,586.89 366.89,560 475,560 535.83,499.17 600.94,499.17 645.24,454.88 645.24,370.24 710.62,304.86 710.62,276.22 727.82,259.02 801.73,259.02 829.29,231.46 829.29,158.62 v1(760.39,89.72)
NetJ1_6: J1.6 R9.2 | length 1269.9
  Top Layer w5.5: v1(724.96,89.72) R9.2 R9.2
  Top Layer w8: J1.6 335,815 v1(335,780)
  Layer 2 w5.5: v1(335,780) 320,765 320,580 355,545 460,545 521.57,483.43 593.07,483.43 609.72,466.78 609.72,307.16 597.01,294.45 597.01,257.05 610.79,243.27 793.86,243.27 811.57,225.55 811.57,176.34 v1(724.96,89.72)
NetR1_1: R1.1 U2.3 | length 191
  Top Layer w6: U2.3 762.48,715 805.67,715 835.67,685 870,685 902.5,652.5 910.5,652.5 R1.1
NetR3_1: R3.1 U5.47 | length 157.4
  Top Layer w8: U5.47 699.37,586.27 753,639.9 753,643 R3.1
NetR4_1: R4.1 U5.46 | length 119.7
  Top Layer w8: U5.46 715.12,583.63 741.49,610 R4.1@765,610
NetR13_1: R13.1 SW1.2 | length 84.1
  Top Layer w8: SW1.2 129.93,83 R13.1
NetU1_2: U1.2 U5.55 | length 480.9
  Top Layer w5.5: U1.2 v1(380.5,670) ; v1(551.73,572.01) 572.2,551.54 572.2,525.95 U5.55
  Layer 2 w5.5: v1(380.5,670) 380.5,604.5 395,590 533.74,590 v1(551.73,572.01)
NetU1_3: U1.3 U5.54 | length 445.6
  Top Layer w5.5: U1.3 v1(405,620) ; v1(581.26,572.01) 581.26,568.08 589.13,560.21 U5.54
  Layer 2 w5.5: v1(405,620) 533.27,620 v1(581.26,572.01)
NetU1_5: U1.5 U5.53 | length 199.8
  Top Layer w5.5: U1.5 520.2,570 555.2,605 577.8,605 604.88,577.91 U5.53
NetU1_6: U1.6 U5.52 | length 209.5
  Top Layer w5.5: U1.6 582.48,620 620.63,581.85 U5.52
NetU1_7: U1.7 U5.51 | length 248.3
  Top Layer w5.5: U1.7 514.76,670 549.76,635 587.17,635 636.38,585.79 U5.51
QSPI_CSn: R11.1 R13.2 U1.1 U5.56 | length 1267.3
  Top Layer w5.5: U1.1 v1(360.25,720) ; v1(532.05,542.48) 556.45,542.48 557.64,541.29 U5.56
  Top Layer w8: v1(170,238.77) 170,185.74 184.24,171.5 191.5,171.5 197.5,165.5 R11.1@197.5,163 ; R13.2 R11.1
  Layer 1 w8: v1(170,238.77) 170,620 245,695 335.25,695 v1(360.25,720)
  Layer 2 w5.5: v1(360.25,720) 360.25,592.23 377.48,575 499.53,575 v1(532.05,542.48)
RUN_EXT: R12.1 SOUTH.6 SW2.2 U5.26 | length 715.9
  Top Layer w5.5: R12.1 249.75,153.25 249.75,148.32 289.29,108.78 289.29,91.07 302.28,78.07 320,78.07 326.93,85 383.64,85 455,13.64 SOUTH.6 ; v1(730.87,205.87) U5.26
  Layer 2 w5.5: SOUTH.6 455,10 583.94,138.94 663.94,138.94 v1(730.87,205.87)
RX: J1.3 NORTH.3 R7.2 | length 763.2
  Top Layer w5.5: v1(360.85,487.36) 360.85,486.22 381.46,465.62 421.37,465.62 R7.2
  Top Layer w8: NORTH.3 275,995.95 300.16,970.79 349.03,921.92 349.03,900.97 J1.3
  Layer 2 w5.5: NORTH.3 279.75,995.25 279.75,568.46 v1(360.85,487.36)
SWCLK: R9.1 U5.24 | length 103.9
  Top Layer w5.5: U5.24 699.37,184.21 715.25,168.33 715.25,161.75 R9.1
SWDIO: R8.1 U5.25 | length 123.6
  Top Layer w5.5: U5.25 715.12,218.76 710.62,214.25 710.62,196.59 722.99,184.21 736.77,184.21 750.25,170.73 750.25,161.75 R8.1
USB_EXT_N: NORTH.9 R4.2 | length 455
  Top Layer w10: R4.2 835,611.5 861.42,637.92 861.42,661.26 v1(863.09,662.92)
  Layer 2 w8: NORTH.9 815,995.95 789.84,970.79 784.35,970.79 778.5,964.94 778.5,876.5 850,805 850,679.26 863.09,666.17 v1(863.09,662.92)
USB_EXT_P: NORTH.8 R3.2 | length 443
  Top Layer w10: v1(795,690) 796.91,688.09 796.91,684.59 825,656.5 R3.2
  Layer 2 w8: NORTH.8 725,995.95 750.16,970.79 755.65,970.79 761.5,964.94 761.5,869.46 833,797.96 833,693 828.31,688.31 796.69,688.31 v1(795,690)
XIN: C24.2 U5.20 X1.1 | length 366.5
  Top Layer w6: C24.2 410,104.25 417.75,96.5 441.73,96.5 X1.1 460.63,81.54 500.55,121.46 500.55,171.74 513.81,185 624.82,185 637.19,197.37 637.19,244.42 U5.20
XOUT: R10.1 U5.21 | length 94.5
  Top Layer w8: R10.1 652.13,189.13 U5.21
pads on no net: J1.0 U4.1

## Polygon pours and split planes (outlines as drawn)
GND on Top Layer "GND_L01_P009" (solid, remove dead copper, pour order 9): 50,680 0,680 0,590 50,590 50,50 320,50 320,0 410,0 410,50 950,50 950,320 1000,320 1000,410 950,410 950,1000 860,1000 860,950 680,950 680,1000 590,1000 590,950 50,950
3V3 on Top Layer "3V3_L01_P003" (solid, remove dead copper, pour order 3): 740,555 920,555 920,485 740,485
GND on Top Layer "GND_L01_P008" (solid, remove dead copper, pour order 8): 775,270 545,270 545,500 775,500
3V3 on Top Layer "3V3_L01_P004" (solid, remove dead copper, pour order 4): 660,473.58 720,473.58 720,615 740,635 740,676.34 660,676.34
NetC9_2 on Top Layer "NETC9_2_L01_P002" (solid, remove dead copper, pour order 2): 855,870 745,870 745,785 775,785 828.5,838.5 855,838.5
3V3 on Layer 1 "3V3_L02_P006" (solid, remove dead copper, pour order 6): 465,505 505,505 505,230 815,230 815,540 515,540 515,795 725,795 725,835 465,835
GND on Layer 1 "GND_L02_P007" (solid, remove dead copper, pour order 7): 50,680 0,680 0,590 50,590 50,50 320,50 320,0 410,0 410,50 950,50 950,320 1000,320 1000,410 950,410 950,1000 860,1000 860,950 680,950 680,1000 590,1000 590,950 50,950
1V1 on Layer 1 "1V1_L02_P005" (solid, remove dead copper, pour order 5): 635,270 635,500 750,500 750,270
GND on Bottom Layer "GND_L04_P000" (solid, remove dead copper, pour order 0): 50,680 0,680 0,590 50,590 50,50 320,50 320,0 410,0 410,50 950,50 950,320 1000,320 1000,410 950,410 950,1000 860,1000 860,950 680,950 680,1000 590,1000 590,950 50,950

## Other copper
Top Layer:
  rectangle net GND: 860,540 915.75,615
  rectangle net GND: 780,540 915.75,580.75
  rectangle net GND: 451.5,769.25 528.5,830.75
  rectangle net GND: 792.28,885 937.72,934.76
  rectangle net GND: 615,641.5 690.75,755
  rectangle net GND: 615,686.5 725.75,755
  rectangle net 3V3: 631.5,776.5 725.75,830.75
  rectangle net 5V: 596.48,842.5 688.52,934.76

## Silkscreen, mask and mechanical layers (free items; w line width, h text height)
Top Overlay:
  circle w20: c35,965 r5
  text "Osborne / Electrical / Engineering" at 60,318.64 h80
  text "RP2040 ISP STAMP" at 59.94,284.49 h60
  text "BOOT" at 62.67,234.49 h60
  text "RESET" at 260.28,234.49 h60
  text "GP0/1 = UART / GP2 = NEOPIX" at 945.04,60 h55 r90
Board Shape:
  the board outline again, w6